# Altium PCB PCB.PcbDoc
Units mm, origin at the board's own origin, x right, y up, seen from the top; angles counter-clockwise.
Board outline 60 x 18.5 mm, 2 copper layers (Top Layer, Bottom Layer); 13 components, 4 nets, 34 pads, 37 vias.
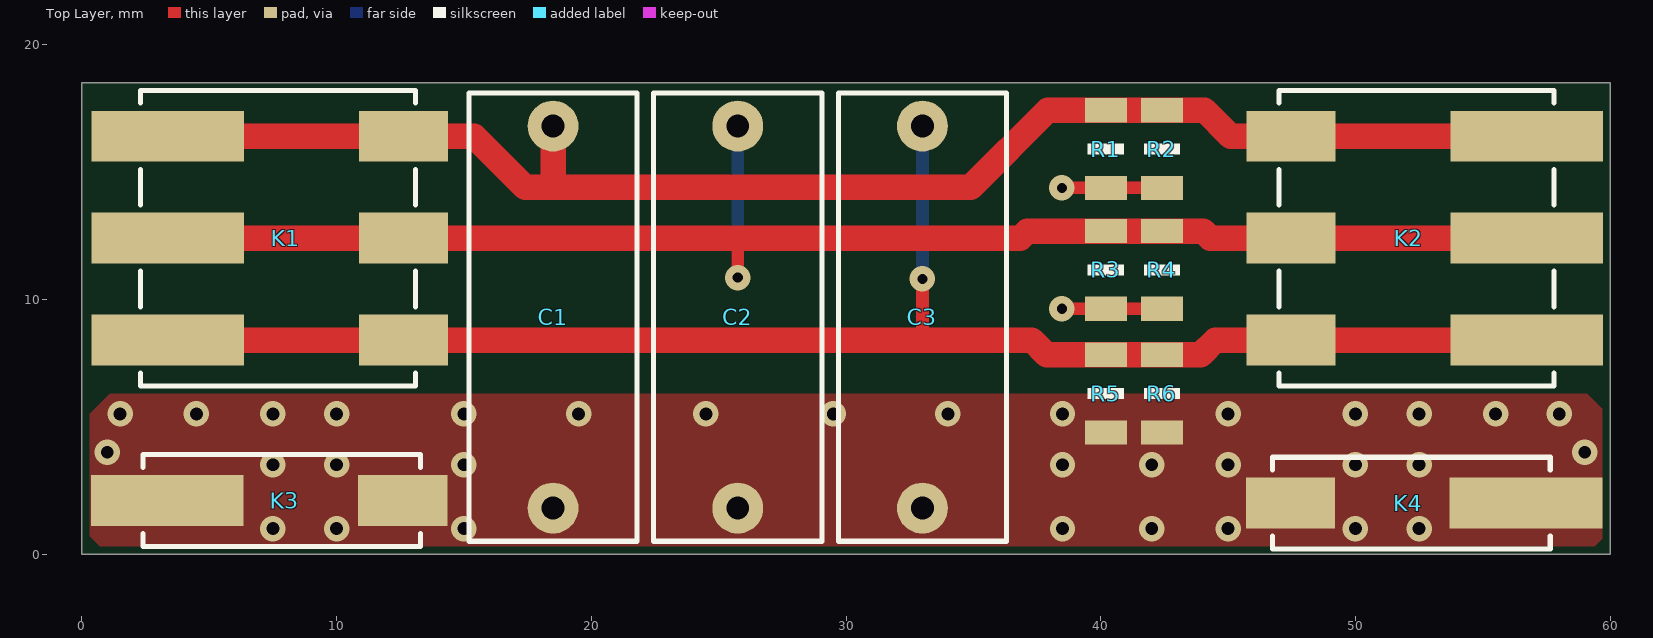
[diagram p0: Top Layer view]
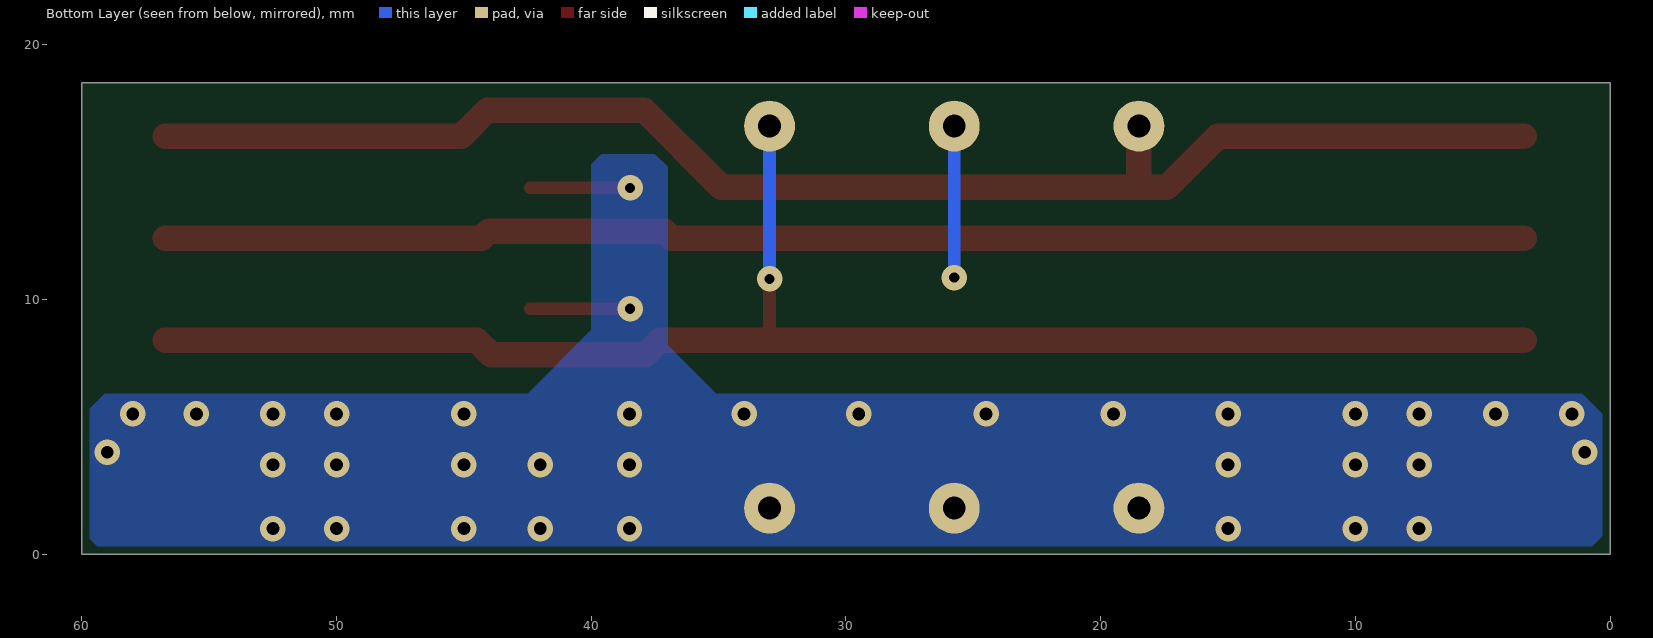
[diagram p1: Bottom Layer view, seen from below]
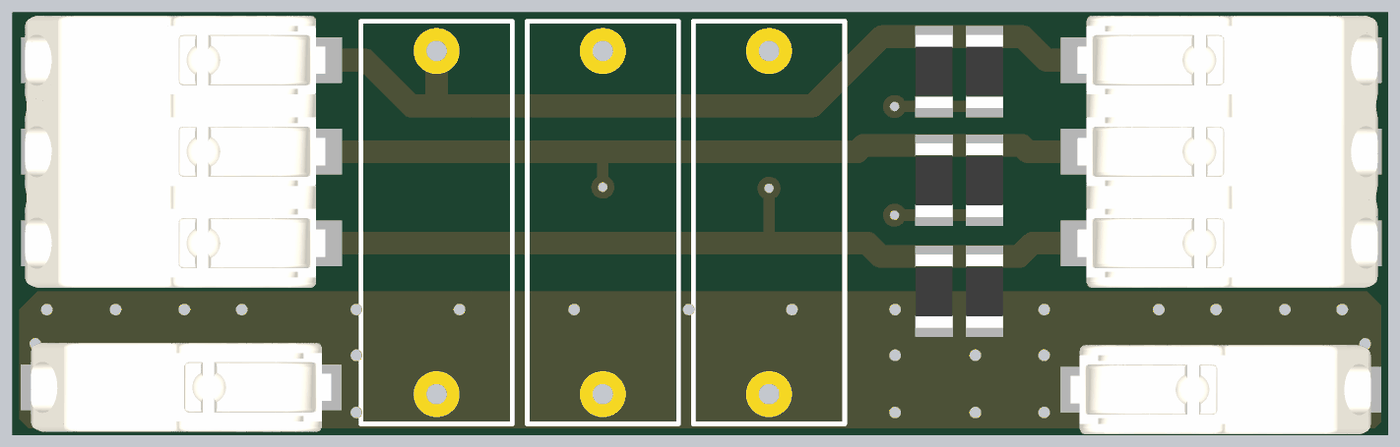
[diagram p2: 3D render of the assembled board from above, using the file's embedded part models]

## Layer stack, top to bottom
Top Solder: solder mask 0.0102, Solder Resist, Dk 3.5
Top Layer: signal copper 0.0356
Dielectric 1: dielectric 0.32, FR-4, Dk 4.8
Bottom Layer: signal copper 0.0356
Bottom Solder: solder mask 0.0102, Solder Resist, Dk 3.5

## Board outline
0,0 60,0 60,18.5 0,18.5

## Design rules (kind name [scope] priority, off if disabled: settings)
Clearance [All] p1: gap=0.254 ignorepadtopadclearanceinfootprint=FALSE except(0: Arc-Hole Track-Hole SMDPad-Hole THPad-Hole Via-Hole Fill-Hole Poly-Hole Region-Hole Text-Hole)
ComponentClearance [All] p1: gap=0 collisioncheckmode=3 verticalgap=0 showdistances=FALSE
PlaneConnect [All] p1: planeconnectstyle=Direct reliefexpansion=0.508 reliefentries=4 reliefconductorwidth=0.254 reliefairgap=0.254
PolygonConnect [All] p1: connectstyle=Direct reliefconductorwidth=0.254 reliefentries=4 polygonreliefangle="90 Angle" airgapwidth=0.254
RoutingVias [All] p1: holewidth=0.4 width=2 viastyle="Through Hole" minholewidth=0.3 minwidth=0.6 maxholewidth=1 maxwidth=1
SolderMaskExpansion [All] p1: expansion=0.102 istentingtop=TRUE
Width [All] p1: maxlimit=3 minlimit=0.3 preferedwidth=0.5
28 further rules are at their usual default settings.

## Components (designator, comment, footprint, x,y, rotation, side; value= is the part's Value field where it differs from the comment)
C1 "22n" C-FOIL-18x13x7 18.5,9.3 r270 top
C2 "22n" C-FOIL-18x13x7 25.75,9.3 r270 top
C3 "22n" C-FOIL-18x13x7 33.001,9.3 r270 top
K1 "2060-453" 2060-453 7.1,12.4 r0 top
K2 "2060-453" 2060-453 53,12.4 r180 top
K3 "2060-451" 2060-451 7.3,2.1 r0 top
K4 "2060-451" 2060-451 52.75,2 r180 top
R1 "22k" R1206 40.2,15.9 r90 top
R2 "22k" R1206 42.4,15.9 r90 top
R3 "22k" R1206 40.2,11.15 r90 top
R4 "22k" R1206 42.4,11.15 r90 top
R5 "22k" R1206 40.2,6.3 r90 top
R6 "22k" R1206 42.4,6.3 r90 top

## Footprints (in the part's own frame and the unit in brackets; to place one, negate y for a bottom-side part, rotate by r counter-clockwise, add the part's x,y. Pads: shape width x height; smd on the part's side, far side on the other; paste and mask are expansions set on the pad)
2060-451 [mm]
  rect 6x2 smd: 1(-3.95,0)
  rect 3.5x2 smd: 1(5.3,0)
  silkscreen extent -4.9,-1.8 6,1.8, body extent -6.5,-1.95 6.6,1.95, height 4.5
2060-453 [mm]
  rect 6x2 smd: 1(-3.725,4) 2(-3.725,0) 3(-3.725,-4)
  rect 3.5x2 smd: 1(5.525,4) 2(5.525,0) 3(5.525,-4)
  silkscreen extent -4.8,-5.8 6,5.8, body extent -6.55,-5.95 6.55,5.95, height 4.5
C-FOIL-18x13x7 [mm]
  round 2 hole 0.9 paste+0 mask+0: 1(-7.5,0) 2(7.5,0)
  silkscreen extent -8.8,-3.3 8.8,3.3, body extent -9,-3.5 9,3.5, height 13
R1206 [mm]
  rect 0.95x1.65 smd: 1(-1.525,0) 2(1.525,0)
  silkscreen extent -0.2,-0.7 0.2,0.7, body extent -1.6,-0.8 1.6,0.8, height 0.6

## Part data
C1 C2 C3: library part C_22n_18x13x7_10%_300V_MKP, "22n THT 10% Y2 MKP 300VAC", Part Number=C_22n_18x13x7_10%_300V_MKP
K1 K2: library part 2060-453/998-404, "2060-453 3P Wago Spring Clamp Terminal SMD", JLCPCB Part=C2765056, Part Number=2060-453/998-404
K3 K4: library part 2060-451/998-404, "2060-451 1P Wago Spring Clamp Terminal SMD", JLCPCB Part=C2765054, Part Number=2060-451/998-404
R1 R2 R3 R4 R5 R6: library part R_22k_1206_1%_200V_250mW, "22k SMD 1206 1% 200V 250mW", Part Number=R_22k_1206_1%_200V_250mW

## Via types
v1: diameter 1, hole 0.5, Top Layer to Bottom Layer, tented both sides, 33 vias
v2: diameter 1, hole 0.4, Top Layer to Bottom Layer, tented both sides, 4 vias

## Nets (pads, with @x,y where several pads share a name; then routed paths per layer and width w, separated by ;. In a path a pad name is that pad's centre, name@x,y a point inside that pad or via, vN(x,y) a via of type N, cw(c..) or ccw(c..) an arc to the next point about the centre after c; other vN are vias at no path point)
NetC1_1: C1.1 K1.1 K2.3 R1.2 R2.2 | length 58.3
  Top Layer w1: K1.1@3.375,16.4 12.625,16.4 15.4,16.4 17.4,14.4 18.5,14.4 ; C1.1 18.5,14.4 ; K2.3@56.725,16.4 47.475,16.4 45.1,16.4 44.075,17.425 R2.2 R1.2 37.925,17.425 34.9,14.4 18.5,14.4
NetC2_1: C2.1 K1.2 K2.2 R3.2 R4.2 | length 61.1
  Top Layer w0.5: 25.7,12.4 25.75,12.35 v2(25.75,10.85)
  Top Layer w1: K1.2@3.375,12.4 12.625,12.4 25.7,12.4 36.85,12.4 37.125,12.675 R3.2 R4.2 44.025,12.675 44.3,12.4 47.475,12.4 K2.2@56.725,12.4
  Bottom Layer w0.5: v2(25.75,10.85) C2.1
NetC3_1: C3.1 K1.3 K2.1 R5.2 R6.2 | length 62.2
  Top Layer w0.5: 33,8.4 v2(33.001,10.801)
  Top Layer w1: K1.3@3.375,8.4 12.625,8.4 33,8.4 37.3,8.4 37.875,7.825 R5.2 R6.2 43.925,7.825 44.5,8.4 47.475,8.4 K2.1@56.725,8.4
  Bottom Layer w0.5: v2(33.001,10.801) C3.1
PE: C1.2 C2.2 C3.2 K3.1 K4.1 R1.1 R2.1 R3.1 R4.1 R5.1 R6.1 | length 7.9
  Top Layer w0.5: v2(38.475,9.625) R3.1 R4.1 ; v2(38.475,14.375) R1.1 ; R1.1 R2.1
  other v1: 7.5,1 10,1 15,1 38.5,1 42,1 45,1 50,1 52.5,1 7.5,3.5 10,3.5 15,3.5 38.5,3.5 42,3.5 45,3.5 50,3.5 52.5,3.5 1,4 59,4 1.5,5.5 4.5,5.5 7.5,5.5 10,5.5 15,5.5 19.5,5.5 24.5,5.5 29.5,5.5 34,5.5 38.5,5.5 45,5.5 50,5.5 52.5,5.5 55.5,5.5 58,5.5

## Polygon pours and split planes (outlines as drawn)
PE on Top Layer "NONET_L-01_P-001" (solid, pour order 0): 0.3,5.5 1.1,6.3 59.1,6.3 59.7,5.7 59.7,0.6 59.4,0.3 0.7,0.3 0.3,0.7
PE on Bottom Layer "NONET_L-01_P-001" (solid, pour order 1): 0.3,5.5 1.1,6.3 35.1,6.3 37,8.2 37,15.2 37.5,15.7 39.6,15.7 40,15.3 40,8.8 42.5,6.3 59.1,6.3 59.7,5.7 59.7,0.6 59.4,0.3 0.7,0.3 0.3,0.7

## Silkscreen, mask and mechanical layers (free items; w line width, h text height)
Mechanical 1:
  the board outline again, w0.25